# Altium PCB PCB.PcbDoc
Units mm, origin at the board's own origin, x right, y up, seen from the top; angles counter-clockwise.
Board outline 150 x 150 mm, 2 copper layers (Top Layer, Bottom Layer); 62 components, 49 nets, 295 pads, 0 vias.
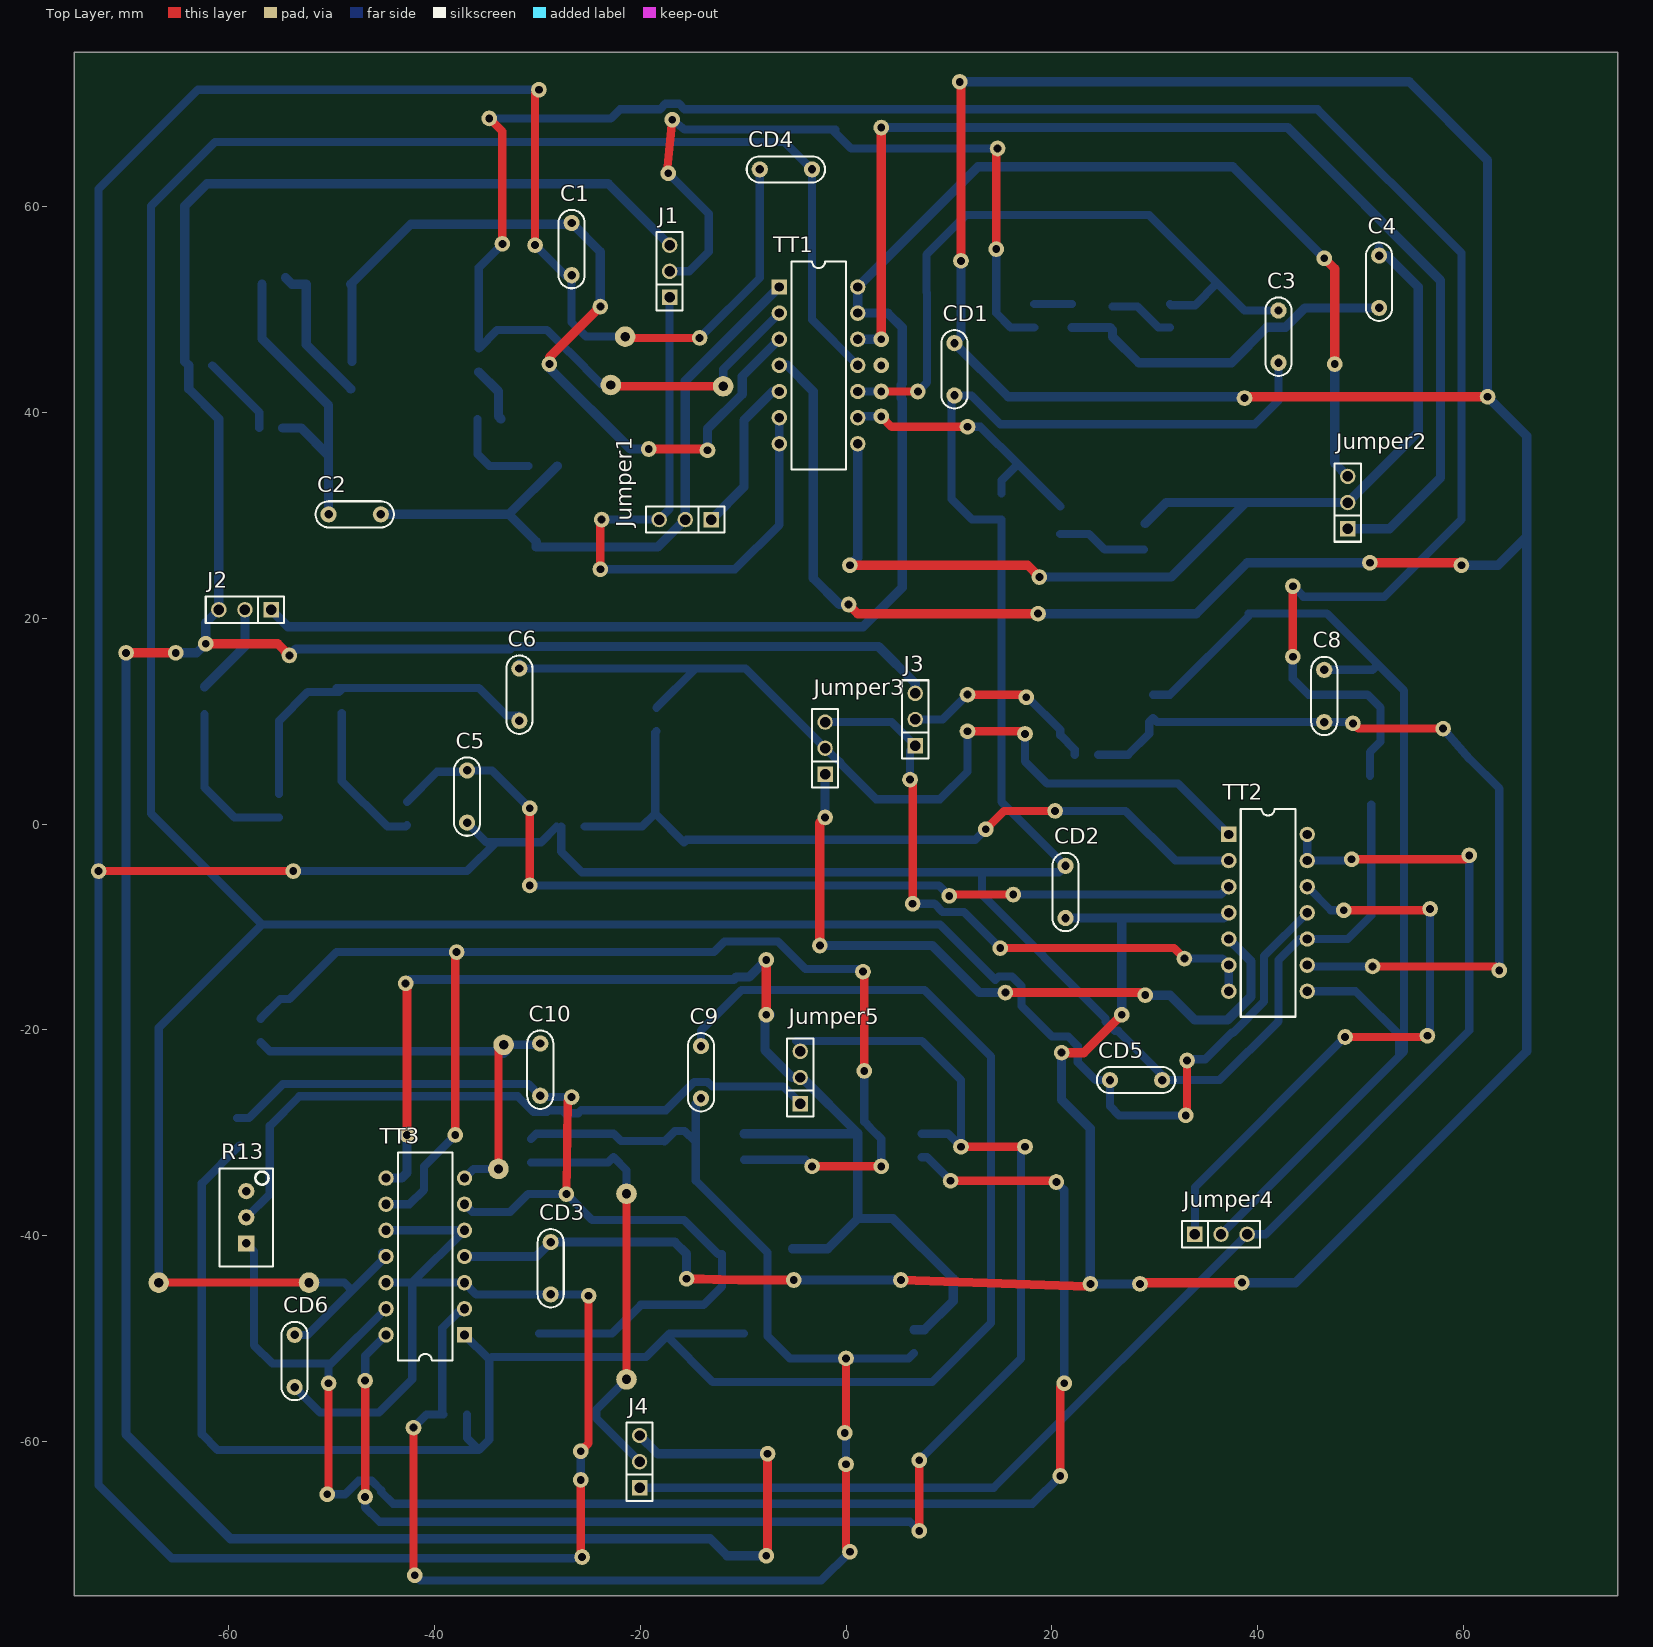
[diagram p0: Top Layer view]
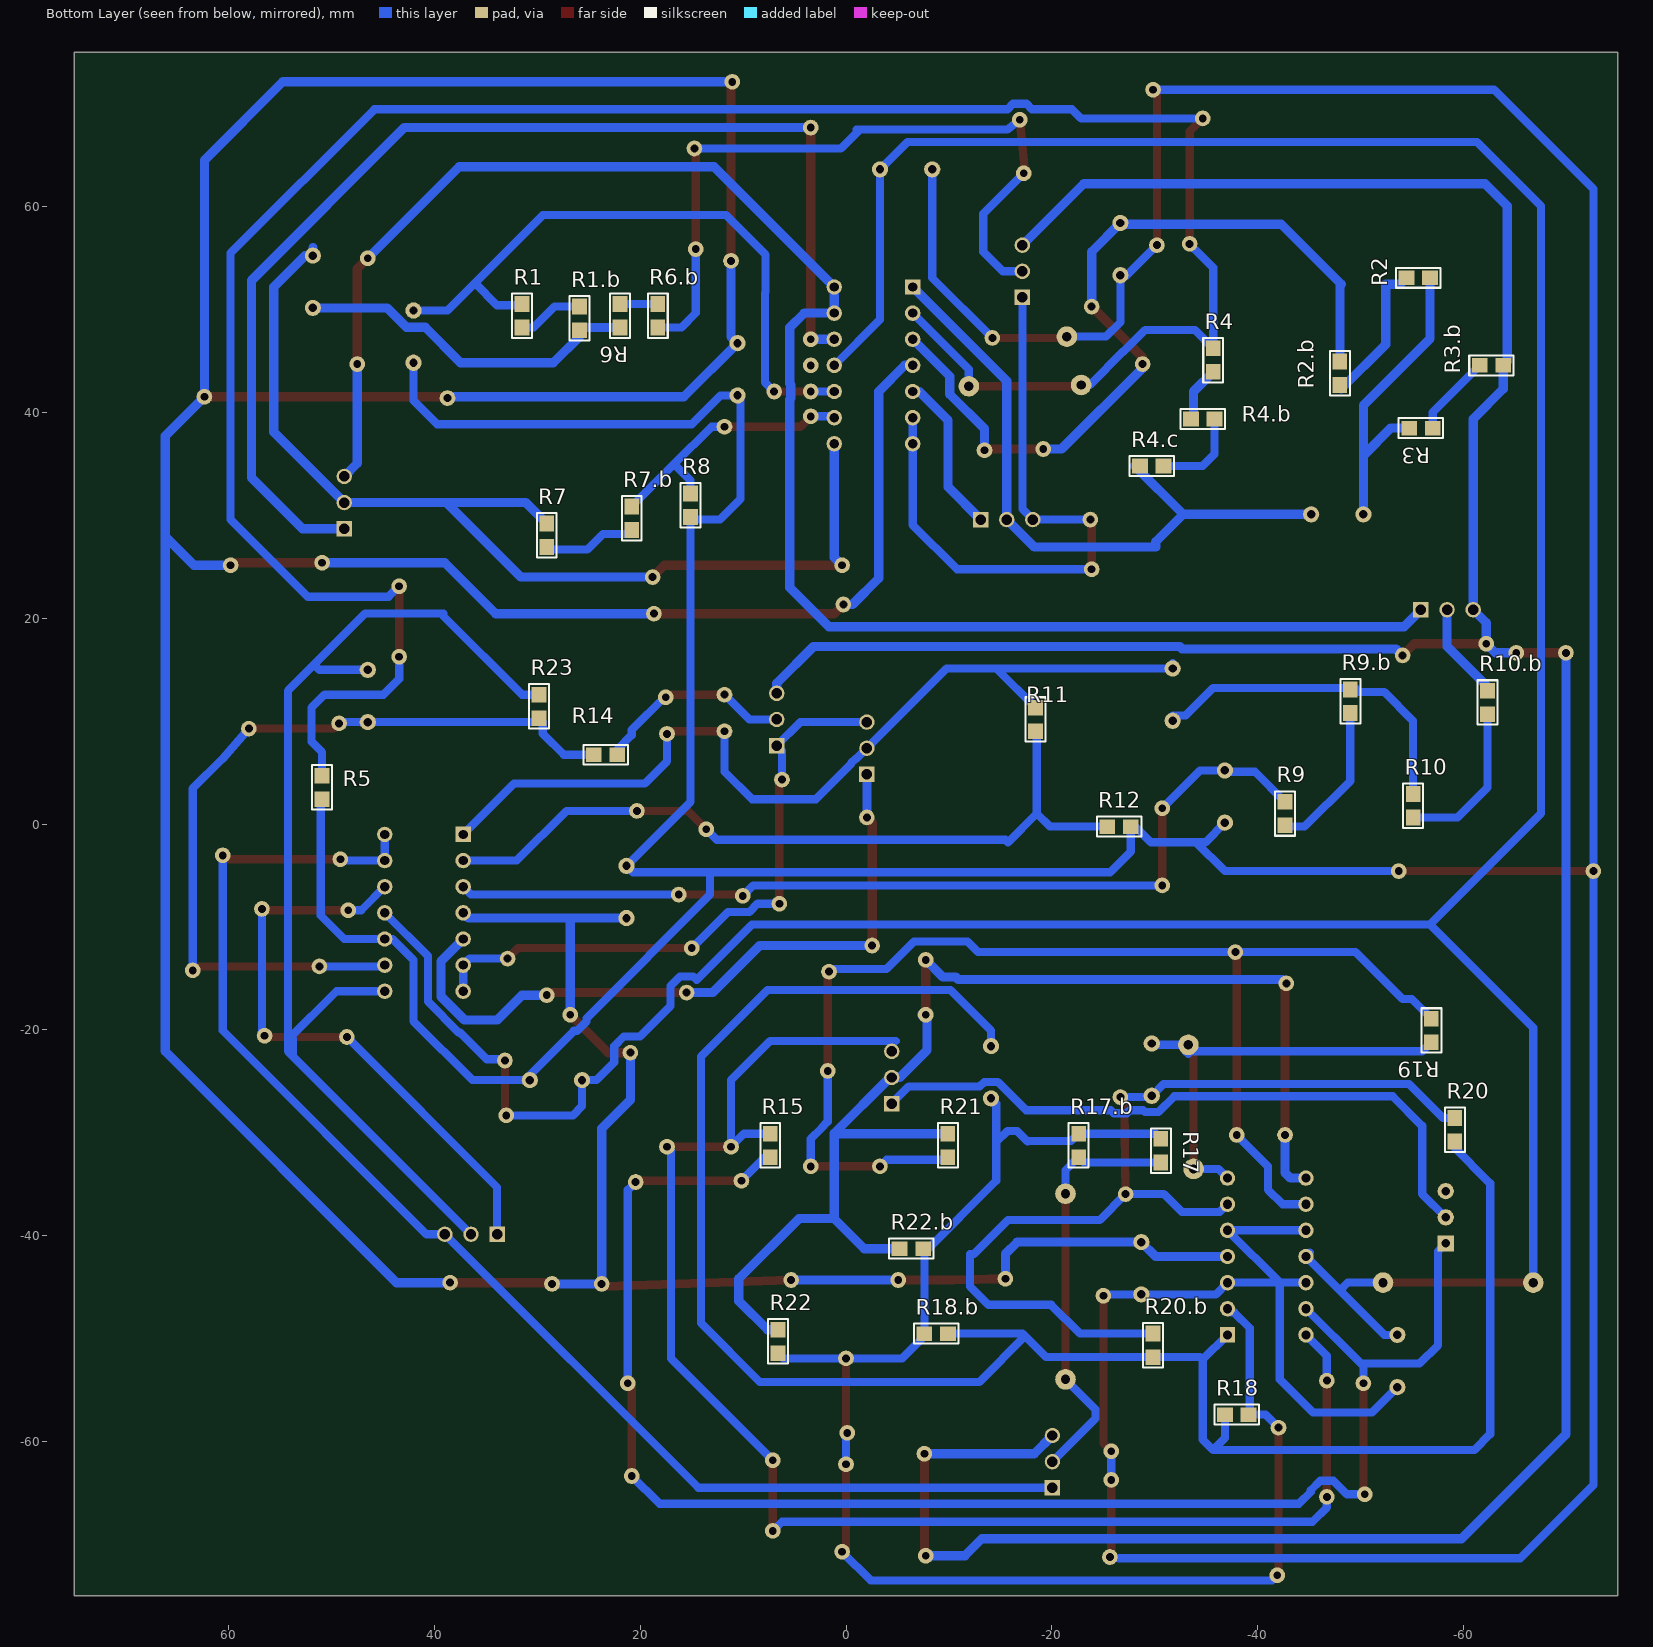
[diagram p1: Bottom Layer view, seen from below]
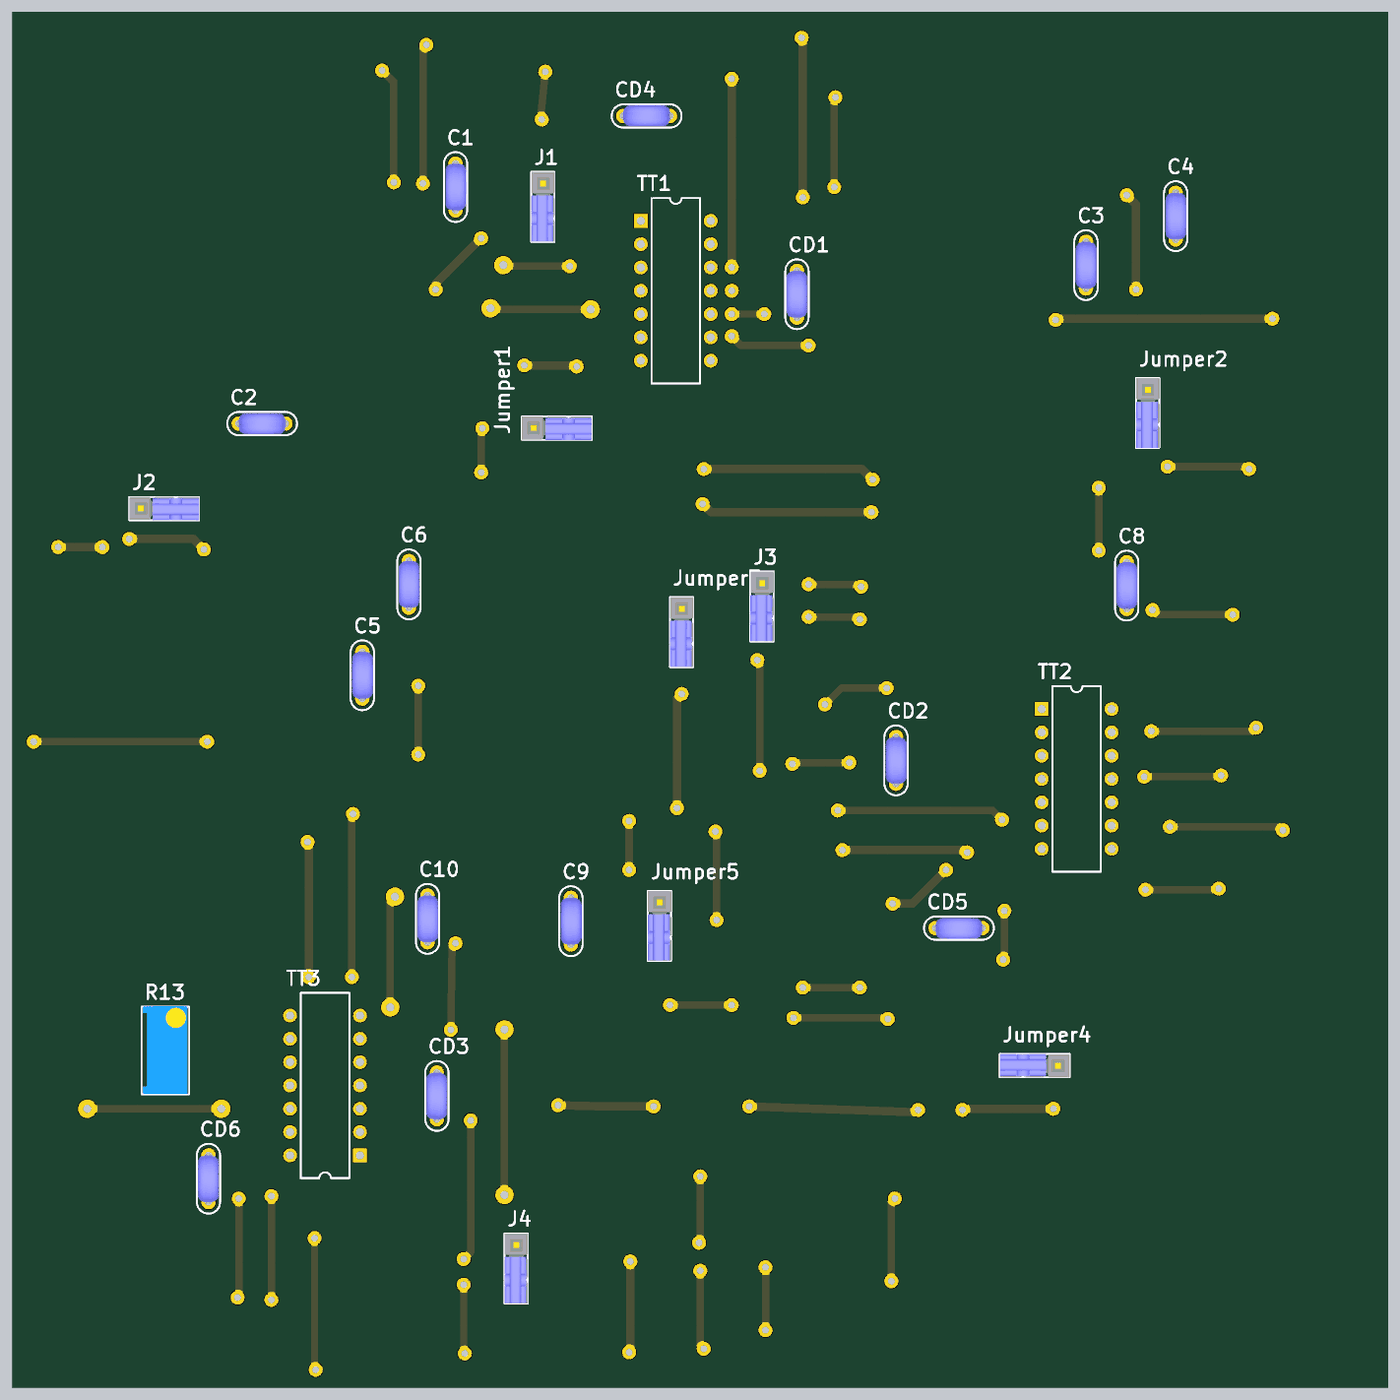
[diagram p2: 3D render of the assembled board from above, using the file's embedded part models]
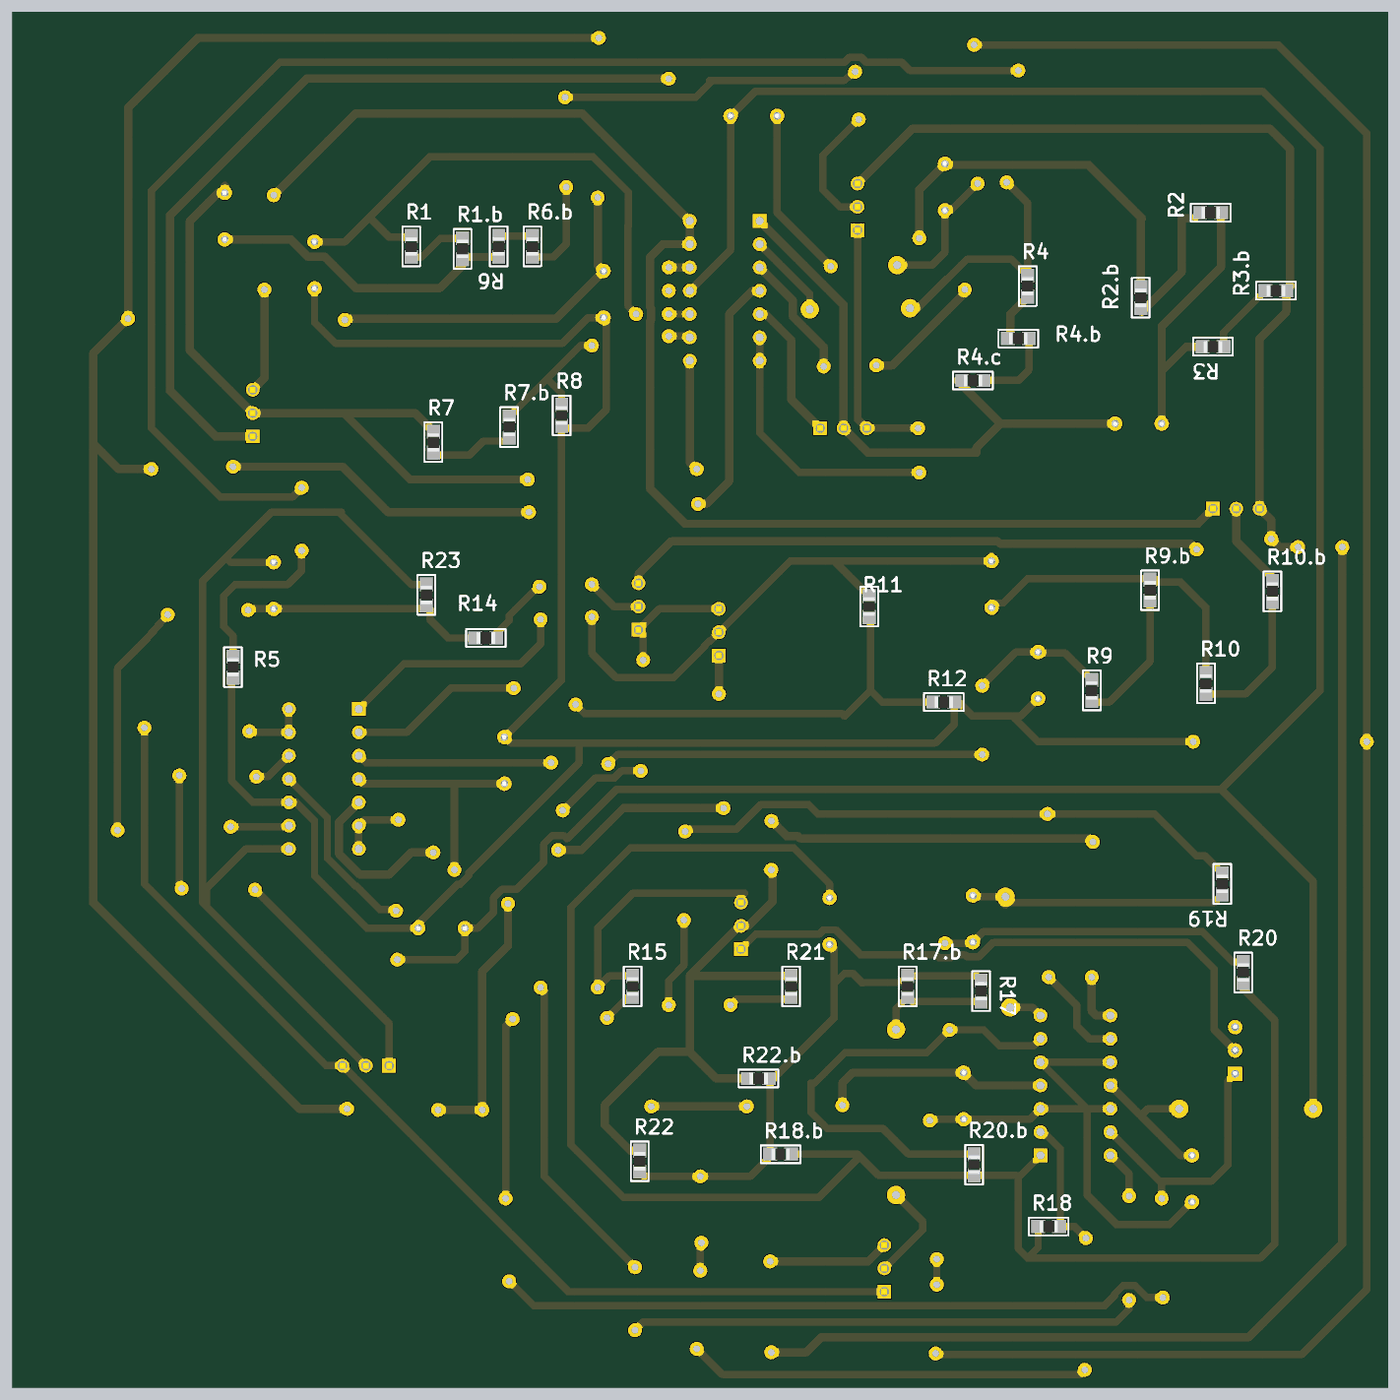
[diagram p3: 3D render of the assembled board from below, using the file's embedded part models]

## Layer stack, top to bottom
Top Solder: solder mask 0.0102, Solder Resist, Dk 3.5
Top Layer: signal copper 0.0356
Dielectric 1: dielectric 0.32, FR-4, Dk 4.8
Bottom Layer: signal copper 0.0356
Bottom Solder: solder mask 0.0102, Solder Resist, Dk 3.5

## Board outline
75,75 75,-75 -75,-75 -75,75

## Design rules (kind name [scope] priority, off if disabled: settings)
Clearance [All] p1: gap=0.4 ignorepadtopadclearanceinfootprint=FALSE except(0: Arc-Hole Track-Hole SMDPad-Hole THPad-Hole Via-Hole Fill-Hole Poly-Hole Region-Hole Text-Hole)
PolygonConnect [All] p1: connectstyle=Relief reliefconductorwidth=0.254 reliefentries=4 polygonreliefangle="90 Angle" airgapwidth=0.254
RoutingVias [All] p1: holewidth=0.5 width=2 viastyle="Through Hole" minholewidth=0.3 minwidth=1.5 maxholewidth=0.5 maxwidth=2
SolderMaskExpansion [All] p1: expansion=0.102
Width [All] p1: maxlimit=0.9 minlimit=0.8 preferedwidth=0.9
30 further rules are at their usual default settings.

## Components (designator, comment, footprint, x,y, rotation, side; value= is the part's Value field where it differs from the comment)
C1 "1n" CAP200 -26.67,55.88 r90 top
C2 "1n" CAP200 -47.752,30.099 r0 top
C3 "1n" CAP200 42.037,47.371 r90 top
C4 "1n" CAP200 51.816,52.705 r90 top
C5 "1n" CAP200 -36.83,2.667 r90 top
C6 "1n" CAP200 -31.75,12.573 r90 top
C8 "7.9n" CAP200 46.482,12.446 r90 top
C9 "10n" CAP200 -14.097,-24.13 r90 top
C10 "10n" CAP200 -29.718,-23.876 r90 top
CD1 "100n" CAP200 10.541,44.196 r270 top
CD2 "100n" CAP200 21.336,-6.604 r90 top
CD3 "100n" CAP200 -28.702,-43.18 r270 top
CD4 "100n" CAP200 -5.842,63.627 r180 top
CD5 "100n" CAP200 28.194,-24.892 r0 top
CD6 "100n" CAP200 -53.594,-52.197 r270 top
J1 "JUMPER" JUMPER3 -17.145,53.721 r90 top
J2 "JUMPER" JUMPER3 -58.42,20.828 r180 top
J3 "JUMPER" JUMPER3 6.731,10.16 r90 top
J4 "JUMPER" JUMPER3 -20.066,-61.976 r90 top
Jumper1 "JUMPER" JUMPER3 -15.621,29.591 r180 top
Jumper2 "JUMPER" JUMPER3 48.768,31.242 r90 top
Jumper3 "JUMPER" JUMPER3 -2.032,7.366 r90 top
Jumper4 "JUMPER" JUMPER3 36.449,-39.878 r0 top
Jumper5 "JUMPER" JUMPER3 -4.445,-24.638 r90 top
R1 "5.1k" 0805 31.496,49.403 r90 bottom
R1.b "39k" 0805 25.908,49.149 r90 bottom
R2 "33k" 0805 -55.626,53.086 r0 bottom
R2.b "2.2k" 0805 -48.006,43.815 r90 bottom
R3 "2.2k" 0805 -55.88,38.481 r0 bottom
R3.b "33k" 0805 -62.738,44.577 r0 bottom
R4 "8.2k" 0805 -35.687,45.085 r90 bottom
R4.b "6.8k" 0805 -34.671,39.37 r180 bottom
R4.c "1k" 0805 -29.718,34.798 r0 bottom
R5 "10k" 0805 50.927,3.556 r90 bottom
R6 "5.1k" 0805 21.971,49.403 r270 bottom
R6.b "39k" 0805 18.288,49.403 r90 bottom
R7 "1.5k" 0805 29.083,28.067 r90 bottom
R7.b "10k" 0805 20.828,29.718 r90 bottom
R8 "10k" 0805 15.113,30.988 r90 bottom
R9 "15k" 0805 -42.672,1.016 r90 bottom
R9.b "47k" 0805 -49.022,11.938 r270 bottom
R10 "15k" 0805 -55.118,1.778 r90 bottom
R10.b "47k" 0805 -62.357,11.811 r270 bottom
R11 "5.1k" 0805 -18.415,10.16 r270 bottom
R12 "10k" 0805 -26.543,-0.254 r0 bottom
R13 "15k" "PRESET V" -58.293,-38.227 r90 top
R14 "10k" 0805 23.368,6.731 r0 bottom
R15 "1.2k" 0805 7.366,-31.242 r90 bottom
R17 "5.6k" 0805 -30.607,-31.75 r90 bottom
R17.b "6.8k" 0805 -22.606,-31.242 r90 bottom
R18 "47k" 0805 -37.973,-57.404 r0 bottom
R18.b "47k" 0805 -8.763,-49.53 r180 bottom
R19 "10k" 0805 -56.896,-20.066 r90 bottom
R20 "5.6k" 0805 -59.182,-29.718 r90 bottom
R20.b "6.8k" 0805 -29.845,-50.673 r90 bottom
R21 "10k" 0805 -9.906,-31.242 r90 bottom
R22 "5.6k" 0805 6.604,-50.292 r90 bottom
R22.b "6.8k" 0805 -6.35,-41.275 r0 bottom
R23 "10k" 0805 29.845,11.43 r90 bottom
TT1 "TL084ACN" DIP14 -2.667,44.577 r270 top
TT2 "TL084ACN" DIP14 41.021,-8.636 r270 top
TT3 "TL084ACN" DIP14 -40.894,-42.037 r90 top

## Footprints (in the part's own frame and the unit in brackets; to place one, negate y for a bottom-side part, rotate by r counter-clockwise, add the part's x,y. Pads: shape width x height; smd on the part's side, far side on the other; paste and mask are expansions set on the pad)
0805 [mil] "Pasivo 0805"
  rect 60x56 smd: 1(-45,0) 2(45,0)
  silkscreen extent -85,-38 85,38, body extent -40,-25 39,25, height 15
CAP200 [mil]
  round 62 hole 32: 1(-100,0) 2(100,0)
  silkscreen extent -150,-50 150,50, body extent -110,-46 110,44, height 246
DIP14 [mm] "DIP; 14 Leads; Row Spacing 7.62 mm; Pitch 2.54 mm"
  rect 1.5x1.5 hole 0.9: 1(-7.62,-3.81)
  round 1.5 hole 0.9: 2(-5.08,-3.81) 3(-2.54,-3.81) 4(0,-3.81) 5(2.54,-3.81) 6(5.08,-3.81) 7(7.62,-3.81) 8(7.62,3.81) 9(5.08,3.81) 10(2.54,3.81) 11(0,3.81) 12(-2.54,3.81) 13(-5.08,3.81) 14(-7.62,3.81)
  silkscreen extent -10.1,-2.65 10.1,2.65
JUMPER3 [mm]
  rect 1.5x1.5 hole 1.016: 1(-2.54,0)
  round 1.5 hole 1.016: 2(0,0) 3(2.54,0)
  silkscreen extent -3.81,-1.27 3.81,1.27, body extent -3.81,-1.3 3.81,1.27, height 16.15
"PRESET V" [mil]
  rect 62x62 hole 32: 1(-100,0)
  round 62 hole 32: 2(0,0) 3(100,0)
  silkscreen extent -188,-102 188,102, body extent -185,-95 190,95, height 455

## Part data
C1 C2 C3 C4 C5 C6 C8 C9 C10 CD1 CD2 CD3 CD4 CD5 CD6: library part CAP
J1 J2 J3 J4 Jumper1 Jumper2 Jumper3 Jumper4 Jumper5: library part JUMPER3
R1 R1.b R2 R2.b R3 R3.b R4 R4.b R4.c R5 R6 R6.b R7 R7.b R8 R9 R9.b R10 R10.b R11 R12 R14 R15 R17 R17.b R18 R18.b R19 R20 R20.b R21 R22 R22.b R23: library part RES
R13: library part PRESET
TT1 TT2 TT3: "General-Purpose J-FET Quad Operational Amplifier", ComponentLink1Description="Manufacturer Link", ComponentLink1URL=http://www.st.com/, ComponentLink2Description=Datasheet, ComponentLink2URL=http://www.st.com/stonline/products/literature/ds/2301/tl084.pdf, DatasheetVersion=Jan-1999, LatestRevisionDate=06-Jun-2005, LatestRevisionNote="Stylized 3D Model Added.", PackageDescription="DIP; 14 Leads; Row Spacing 7.62 mm; Pitch 2.54 mm", PackageReference=DIP14, PackageVersion=Jan-1997, Published=24-Aug-2001, Publisher="Altium Limited"

## Free pads (board coordinates)
  round 2 hole 0.9: 2(-21.336,-35.941) 3(-21.336,-53.975) 4(-52.197,-44.577) 5(-66.802,-44.577) 8(-22.86,42.672) 8(-11.938,42.545) 11(-21.463,47.371) 13(-33.782,-33.528) 14(-33.274,-21.463)
  round 1.524 hole 0.762: 9(-23.749,29.591) 10(-23.876,24.765) 12(-14.224,47.244) 15(-26.67,-26.543) 16(-27.178,-35.973) 19(11.176,-31.369) 20(17.399,-31.369) 21(-46.736,-54.102) 22(-46.736,-65.405) 23(7.112,-61.849) 24(7.112,-68.707) 25(-23.876,50.292) 26(-28.829,44.704) 27(-19.177,36.449) 28(-13.462,36.322) 29(10.16,-34.671) 30(20.447,-34.798) 31(21.209,-54.356) 32(20.828,-63.373) 33(-50.292,-54.356) 34(-50.419,-65.151) 35(3.429,42.037) 36(6.985,42.037) 41(47.498,44.704) 42(46.482,54.991) 45(49.149,-3.429) 46(60.579,-3.048) 47(-30.734,-5.969) 48(-30.734,1.524) 49(10.033,-6.985) 50(16.256,-6.858) 51(13.589,-0.508) 52(20.32,1.27) 54(11.811,12.573) 55(17.526,12.319) 56(11.811,9.017) 57(17.399,8.763) 58(11.811,38.608) 59(3.429,39.624) 60(-15.494,-44.196) 61(-5.08,-44.323) 62(5.334,-44.323) 63(23.749,-44.704) 64(20.955,-22.225) 66(48.387,-8.382) 67(48.514,-20.701) 70(-7.62,-61.214) 71(-7.747,-71.12) 72(-54.102,16.383) 73(-69.977,16.637) 74(-65.151,16.637) 75(-62.23,17.526) 76(26.797,-18.542) 77(-2.032,0.635) 78(-2.54,-11.811) 79(15.494,-16.383) 80(29.083,-16.637) 81(32.893,-13.081) 82(14.986,-12.065) 83(6.477,-7.747) 84(6.223,4.318) 85(14.605,55.88) 86(14.732,65.659) 87(-17.272,63.246) 88(-16.891,68.453) 90(-33.401,56.388) 91(-34.671,68.58) 92(43.434,23.114) 93(43.434,16.256) 94(33.147,-22.987) 95(33.02,-28.321) 96(56.769,-8.255) 97(56.515,-20.574) 98(51.181,-13.843) 99(63.5,-14.224) 100(49.276,9.779) 101(58.039,9.271) 102(0.381,25.146) 103(18.796,24.003) 104(3.429,47.117) 105(3.429,44.577) 106(3.429,67.691) 107(-25.019,-45.847) 108(-25.781,-60.96) 109(-25.781,-63.754) 110(-25.654,-71.247) 111(-53.721,-4.572) 112(-72.644,-4.572) 113(-42.672,-30.226) 114(-42.799,-15.494) 115(-7.747,-13.208) 116(-7.747,-18.542) 117(1.651,-14.351) 118(1.778,-24.003) 119(3.429,-33.274) 120(-3.302,-33.274) 121(-37.973,-30.226) 122(-37.846,-12.446) 123(38.735,41.402) 124(62.357,41.529) 125(28.575,-44.704) 126(38.481,-44.577) 127(11.176,54.737) 128(11.049,72.136) 130(-30.226,56.261) 131(-29.845,71.374) 132(0.254,21.336) 133(18.669,20.447) 134(50.927,25.4) 135(59.817,25.146) 137(-42.037,-58.674) 138(-41.91,-73.025) 139(0,-62.23) 140(0.381,-70.739) 141(0,-51.943) 142(-0.127,-59.182)

## Nets (pads, with @x,y where several pads share a name; then routed paths per layer and width w, separated by ;. In a path a pad name is that pad's centre, name@x,y a point inside that pad or via, vN(x,y) a via of type N, cw(c..) or ccw(c..) an arc to the next point about the centre after c; other vN are vias at no path point)
GND: C1.1 C3.1 C5.1 CD1.2 CD2.2 CD3.2 CD4.2 CD5.2 CD6.2 pad.11 pad.12 pad.107 pad.108 pad.109 pad.110 pad.111 pad.112 pad.130 pad.131 R5.1 R8.1 R12.1 TT2.10 TT3.3 TT3.5 TT3.10 TT3.12 | length 623.9
  Top Layer w0.8: pad.112 pad.111 ; pad.130 -30.226,70.993 pad.131 ; pad.109 -25.781,-71.12 pad.110 ; pad.108 -25.019,-60.198 pad.107 ; pad.11 -21.336,47.244 pad.12
  Bottom Layer w0.8: pad.111 -36.83,-4.572 -34.036,-1.778 ; CD6.2 -51.117,-57.213 -45.402,-57.213 -42.164,-53.975 -42.164,-44.577 ; TT3.12 -42.164,-44.577 ; TT3.10 TT3.5 -42.164,-44.577 ; C5.1 -34.925,-1.778 -34.036,-1.778 ; pad.130 -27.305,53.34 C1.1 -26.67,48.768 -25.273,47.371 pad.11 ; pad.131 -62.992,71.374 -72.644,61.722 pad.112 -72.644,-64.262 -65.532,-71.374 -26.543,-71.374 pad.110 ; R12.1@-28.144,-0.267 -29.656,-1.778 -34.036,-1.778 ; R12.1 -27.686,-2.667 -25.654,-4.699 13.208,-4.699 ; pad.109 pad.108 ; pad.107 -25.146,-45.72 CD3.2 -35.941,-45.72 TT3.3 -42.164,-44.577 ; pad.12 -8.382,53.086 CD4.2 ; C3.1 42.037,41.148 39.751,38.862 14.986,38.862 12.192,41.656 CD1.2 10.249,41.364 10.249,31.585 12.243,29.591 15.113,29.591 15.113,2.159 CD2.2 20.701,-4.699 13.208,-4.699 ; R5.1@51.054,1.905 51.054,-8.89 48.768,-11.176 TT2.10 44.069,-11.176 42.037,-13.208 42.037,-19.177 36.322,-24.892 CD5.2 30.734,-24.384 26.454,-20.104 26.15,-20.104 25.235,-19.189 25.235,-18.885 13.208,-6.858 13.208,-4.699
NetC1_2: C1.2 pad.25 pad.26 pad.27 pad.28 R2.b.2 TT1.3 | length 81.2
  Top Layer w0.9: pad.26 -28.829,45.339 pad.25 ; pad.27 -13.589,36.449 pad.28
  Bottom Layer w0.9: R2.b.2 -48.006,52.324 -48.133,52.451 -42.291,58.293 -26.797,58.293 C1.2 -23.876,55.626 pad.25 ; pad.26 -28.829,44.323 -20.955,36.449 pad.27 ; pad.28 -13.462,38.405 -10.088,41.779 -10.088,43.506 TT1.3
NetC2_1: C2.1 R2.1 R3.2 | length 30.6
  Bottom Layer w0.9: R2.1@-56.769,52.451 -56.769,47.177 -50.292,40.7 -50.292,35.814 ; R3.2 -52.959,38.481 -50.292,35.814 ; C2.1 -50.292,35.814
NetC3_2: C3.2 pad.35 pad.36 R1.2 TT1.10 | length 64.7
  Top Layer w0.8: pad.35 pad.36
  Bottom Layer w0.8: TT1.10 pad.35 ; pad.36 7.874,42.926 7.874,51.639 7.836,51.677 7.836,55.334 11.684,59.182 29.464,59.182 36.068,52.578 ; R1.2 31.623,50.419 33.909,50.419 36.068,52.578 ; C3.2 38.735,49.911 36.068,52.578
NetC4_1: C4.1 R1.b.1 R6.2 | length 33.8
  Bottom Layer w0.9: R6.2 25.654,48.26 R1.b.1 25.908,47.371 28.448,44.831 37.465,44.831 40.908,48.274 42.715,48.274 44.607,50.165 C4.1
NetC5_2: C5.2 pad.47 pad.48 pad.49 pad.50 R9.2 TT2.3 | length 91
  Top Layer w0.8: pad.47 pad.48 ; pad.49 10.16,-6.858 pad.50
  Bottom Layer w0.8: R9.2 -39.751,5.08 -36.957,5.08 C5.2 -34.417,5.207 pad.48 ; pad.47 9.017,-5.969 pad.49 ; pad.50 36.449,-6.858 TT2.3
NetC6_1: C6.1 R9.b.1 R10.2 | length 33.4
  Bottom Layer w0.8: R10.2 -55.118,10.033 -52.324,12.827 -49.276,12.827 R9.b.1 ; R9.b.1@-49.53,13.208 -35.687,13.208 -33.02,10.541 C6.1@-31.75,10.541
NetC8_1: C8.1 pad.98 pad.99 pad.100 pad.101 R14.2 R23.1 TT2.9 | length 80.6
  Top Layer w0.8: pad.100 49.784,9.271 pad.101 ; pad.98 63.119,-13.843 pad.99
  Bottom Layer w0.8: R14.2 27.432,6.731 29.464,8.763 29.464,9.906 R23.1 30.226,9.906 C8.1 49.149,9.906 pad.100 ; TT2.9 44.958,-13.843 pad.98 ; pad.101 60.579,6.35 63.5,3.429 pad.99
NetC9_1: C9.1 pad.137 pad.138 pad.139 pad.140 pad.141 pad.142 R17.2 R17.b.2 R18.1 R18.b.1 R22.1 R22.b.1 TT3.2 | length 150.9
  Top Layer w0.8: pad.137 -42.037,-72.898 pad.138 ; pad.142 0,-59.055 pad.141 ; pad.139 0,-70.358 pad.140
  Bottom Layer w0.8: pad.137 -40.767,-57.404 R18.1@-39.243,-57.404 ; pad.138 -41.402,-73.533 -2.413,-73.533 pad.140 ; R18.1 R18.1@-39.243,-57.404 ; TT3.2 -37.434,-47.467 -37.734,-47.467 -39.243,-48.976 R18.1@-39.243,-57.404 ; R17.2 -30.099,-30.099 R17.b.2 -21.882,-30.823 -17.653,-30.823 -17.653,-30.861 -16.637,-29.845 -15.684,-29.845 -14.605,-30.924 ; C9.1 -14.605,-27.178 -14.605,-30.924 ; pad.142 0,-59.309 pad.139 ; R22.1 6.096,-51.943 pad.141 -5.461,-51.943 -7.62,-49.784 R18.b.1 -7.62,-41.656 -14.605,-34.671 -14.605,-30.924
NetC9_2: C9.2 R18.2 R18.b.2 R20.1 R20.b.1 TT3.1 | length 195.1
  Bottom Layer w0.8: R20.1@-58.928,-31.242 -62.611,-34.925 -62.611,-59.309 -61.087,-60.833 -35.687,-60.833 ; TT3.1 -34.671,-52.07 ; R18.2 -36.83,-59.69 -35.687,-60.833 ; -17.399,-49.784 -12.954,-54.229 8.382,-54.229 14.097,-48.514 14.097,-22.606 7.62,-16.129 -10.16,-16.129 -14.097,-20.066 C9.2 ; R18.b.2 -17.145,-49.53 -19.431,-51.816 R20.b.1 -34.417,-51.816 -34.671,-52.07 ; -35.687,-60.833 -34.671,-59.817 -34.671,-52.07
NetC10_1: C10.1 pad.15 pad.16 R20.2 R20.b.2 TT3.6 | length 95.3
  Top Layer w0.8: pad.16 -27.051,-26.924 pad.15
  Bottom Layer w0.8: R20.2 -58.039,-28.575 -54.737,-25.273 -30.861,-25.273 C10.1 -29.591,-26.543 pad.15 ; TT3.6 -36.322,-37.719 -32.639,-37.719 -30.893,-35.973 pad.16 -24.67,-38.481 -15.748,-38.481 -12.446,-41.783 -12.065,-41.783 -12.065,-44.958 -13.843,-46.736 -19.939,-46.736 -22.733,-49.53 R20.b.2
NetC10_2: C10.2 pad.13 pad.14 R19.1 TT3.7 | length 45.1
  Top Layer w0.8: pad.13 -33.782,-21.971 pad.14
  Bottom Layer w0.8: R19.1 -56.007,-22.098 pad.14@-33.274,-22.098 ; TT3.7 -36.195,-33.528 pad.13 ; C10.2 -29.845,-21.463 pad.14 pad.14@-33.274,-22.098 ; pad.14@-33.274,-22.098 -33.274,-22.365 -33.007,-22.098 pad.14@-33.274,-22.098
NetJ1_2: J1.2 pad.85 pad.86 pad.87 pad.88 R6.b.1 | length 72.8
  Top Layer w0.8: pad.87 -17.399,63.373 pad.88 ; pad.85 14.605,65.642 pad.86
  Bottom Layer w0.8: pad.87 -13.335,59.309 -13.335,55.626 -15.24,53.721 J1.2 ; pad.88 -15.679,67.494 -1.017,67.494 -1.295,67.462 0.508,65.659 pad.86 ; pad.85 14.605,49.657 16.002,48.26 R6.b.1
NetJ2_2: J2.2 R10.b.1 | length 9.1
  Bottom Layer w0.9: R10.b.1@-62.357,13.335 -58.42,17.272 J2.2
NetJ3_2: J3.2 pad.54 pad.55 R14.1 | length 19.5
  Top Layer w0.8: pad.54 17.272,12.573 pad.55
  Bottom Layer w0.8: J3.2 9.398,10.16 pad.54 ; pad.55 17.653,12.319 20.828,9.144 20.828,8.636 22.225,7.239 R14.1
NetJ4_2: J4.2 pad.2 pad.3 R17.1 R17.b.1 | length 41.3
  Top Layer w0.8: pad.3 pad.2
  Bottom Layer w0.8: R17.1 -23.114,-32.893 R17.b.1 -21.336,-33.655 pad.2 ; pad.3 -24.257,-56.896 -24.257,-57.785 J4.2
NetJumper1_1: Jumper1.1 TT1.5 | length 15.6
  Bottom Layer w0.9: Jumper1.1 -9.906,32.766 -9.906,39.243 -7.112,42.037 TT1.5
NetJumper2_1: Jumper2.1 pad.104 pad.106 TT1.12 | length 113.6
  Top Layer w0.9: pad.104 pad.106
  Bottom Layer w0.9: TT1.12 pad.104 ; pad.106 42.926,67.691 57.785,52.832 57.785,33.655 52.832,28.702 Jumper2.1
NetJumper3_1: Jumper3.1 pad.77 pad.78 pad.79 pad.80 TT2.5 | length 69.2
  Top Layer w0.9: pad.78 -2.54,0.127 pad.77 ; pad.79 28.829,-16.383 pad.80
  Bottom Layer w0.9: pad.78 8.382,-11.811 12.954,-16.383 pad.79 ; pad.77 Jumper3.1 ; pad.80 31.496,-16.637 33.909,-19.05 37.084,-19.05 39.37,-16.764 39.37,-13.335 TT2.5
NetJumper4_1: Jumper4.1 pad.66 pad.67 pad.96 pad.97 TT2.12 | length 58.8
  Top Layer w0.8: pad.67 56.388,-20.701 pad.97 ; pad.66@48.514,-8.509 pad.66 56.642,-8.382 pad.96
  Bottom Layer w0.8: Jumper4.1 33.909,-35.306 pad.67 ; TT2.12 47.117,-8.382 pad.66 ; pad.97 56.769,-20.32 pad.96
NetJumper5_1: Jumper5.1 R13.2 | length 65.5
  Bottom Layer w0.8: R13.2 -56.007,-35.941 -56.007,-29.337 -53.143,-26.473 -31.906,-26.473 -30.376,-28.003 -29.06,-28.003 -28.87,-27.813 -27.609,-27.813 -27.317,-28.105 -26.023,-28.105 -25.731,-27.813 -17.485,-27.813 -14.755,-25.083 -13.439,-25.083 -12.995,-25.527 -6.096,-25.527 Jumper5.1
NetR1_1: R1.1 R1.b.2 | length 6.4
  Bottom Layer w0.8: R1.b.2 28.321,50.292 30.353,48.26 R1.1
NetR2_2: R2.2 R2.b.1 | length 14.2
  Bottom Layer w0.9: R2.2 -53.848,52.451 -52.451,52.451 -52.451,46.609 R2.b.1@-48.133,42.291
NetR3_1: R3.1 R3.b.2 | length 8
  Bottom Layer w0.8: R3.b.2 -57.023,40.005 R3.1
NetR4.b_2: R4.b.2 R4.c.1 | length 8.9
  Bottom Layer w0.8: R4.b.2 -35.814,35.941 -34.671,34.798 R4.c.1
NetR4_1: R4.1 R4.b.1 | length 5.5
  Bottom Layer w0.9: R4.1 -33.782,42.037 -33.782,39.624 R4.b.1
NetR4_2: pad.8 pad.90 pad.91 pad.92 pad.93 R4.2 R5.2 TT1.2 | length 232.6
  Top Layer w0.8: pad.91 -33.401,67.31 pad.90 ; pad.8@-22.86,42.672 -22.733,42.545 pad.8@-11.938,42.545 ; pad.93 pad.92
  Bottom Layer w0.8: pad.91 -22.86,68.58 -21.971,69.469 -18.084,69.469 -17.538,70.015 -16.244,70.015 -15.698,69.469 45.847,69.469 59.817,55.499 59.817,29.591 52.324,22.098 44.45,22.098 pad.92 ; pad.90 -35.687,54.102 R4.2 -33.909,48.006 -29.083,48.006 -27.031,45.954 -26.991,45.954 -23.709,42.672 pad.8@-22.86,42.672 ; pad.8@-11.938,42.545 -11.938,44.196 TT1.2 ; pad.93 43.434,14.097 44.958,12.573 50.673,12.573 51.943,11.303 51.943,8.001 50.927,6.985 R5.2
NetR6_1: R6.1 R6.b.2 | length 3.7
  Bottom Layer w0.8: R6.b.2 R6.1
NetR7.b_2: pad.58 pad.59 R7.b.2 R8.2 TT1.9 | length 26.9
  Top Layer w0.8: pad.59 4.445,38.608 pad.58
  Bottom Layer w0.8: TT1.9 1.27,39.624 pad.59 ; pad.58 13.081,38.608 16.7,34.989 ; R8.2 15.113,33.401 16.7,34.989 ; R7.b.2 16.7,34.989
NetR7_1: R7.1 R7.b.1 | length 8.8
  Bottom Layer w0.8: R7.b.1@20.828,28.194 23.622,28.194 25.146,26.67 R7.1@28.956,26.67
NetR9_1: R9.1 R9.b.2 | length 14.8
  Bottom Layer w0.8: R9.b.2 -49.022,4.191 -44.577,-0.254 -42.799,-0.254 R9.1
NetR10_1: R10.1 R10.b.2 | length 15.6
  Bottom Layer w0.8: R10.b.2 -62.357,3.556 -59.436,0.635 R10.1
NetR11_2: pad.51 pad.52 R11.2 R12.2 TT2.2 | length 75.6
  Top Layer w0.8: pad.51 15.367,1.27 pad.52
  Bottom Layer w0.8: R12.2 -19.812,-0.254 -18.542,1.016 ; R11.2 -18.542,8.89 -18.542,1.016 ; pad.51 12.573,-1.524 -15.494,-1.524 -15.748,-1.778 -18.542,1.016 ; pad.52 27.178,1.27 32.004,-3.556 TT2.2
NetR13_1: pad.29 pad.30 pad.31 pad.32 pad.33 pad.34 R13.1 R15.1 TT3.13 | length 155.9
  Top Layer w0.8: pad.34 -50.292,-65.024 pad.33 ; pad.29 20.32,-34.671 pad.30 ; pad.32 20.828,-54.737 pad.31
  Bottom Layer w0.8: R13.1 -57.531,-41.529 -57.531,-50.673 -55.753,-52.451 -50.038,-52.451 ; pad.34 -48.691,-65.151 -47.383,-63.843 -46.089,-63.843 -45.174,-64.758 -45.174,-64.935 -44.043,-66.066 18.135,-66.066 pad.32 ; pad.33 -50.292,-52.705 -50.038,-52.451 ; TT3.13 -50.038,-52.451 ; R15.1 7.874,-32.385 pad.29 ; pad.30 21.209,-35.56 pad.31
NetR19_2: pad.117 pad.118 pad.119 pad.120 pad.121 pad.122 R19.2 R21.1 TT3.9 | length 124.8
  Top Layer w0.8: pad.121 -37.973,-12.573 pad.122 ; pad.120 pad.119 ; pad.117 1.778,-14.478 pad.118
  Bottom Layer w0.8: R19.2 -54.991,-17.018 -54.102,-17.018 -49.53,-12.446 pad.122 -12.827,-12.446 -11.811,-11.43 -6.604,-11.43 -3.937,-14.097 1.397,-14.097 pad.117 ; TT3.9 -42.418,-36.957 -41.021,-35.56 -41.021,-33.274 pad.121 ; R21.1@-9.906,-32.639 -3.937,-32.639 pad.120 ; pad.118 1.778,-28.931 2.393,-29.546 2.393,-29.571 3.429,-30.607 pad.119
Vcc+: CD1.1 CD2.1 CD3.1 pad.60 pad.61 pad.62 pad.63 pad.64 pad.76 pad.123 pad.124 pad.125 pad.126 pad.127 pad.128 pad.132 pad.133 pad.134 pad.135 TT1.4 TT2.4 TT3.4 | length 492
  Top Layer w0.9: pad.60 -10.414,-44.323 pad.61 ; pad.132 1.143,20.447 pad.133 ; pad.62 23.495,-44.958 pad.63 ; pad.128 11.176,72.009 pad.127 ; pad.64 23.114,-22.225 pad.76 ; pad.125 28.702,-44.577 pad.126 ; pad.123 38.862,41.529 pad.124 ; pad.134 59.563,25.4 pad.135
  Bottom Layer w0.9: TT3.4 -30.099,-42.037 CD3.1 -16.637,-40.64 -15.494,-41.783 pad.60 ; TT1.4 -5.715,44.577 -3.175,42.037 -3.175,23.876 -0.635,21.336 pad.132 ; pad.61 pad.62 ; pad.128 54.737,72.136 62.357,64.516 pad.124 66.167,37.719 66.167,27.94 ; pad.127 11.176,47.371 CD1.1 15.762,41.515 38.735,41.515 pad.123 ; pad.133 34.036,20.447 38.989,25.4 pad.134 ; pad.64 20.955,-26.797 23.749,-29.591 pad.63 pad.125 ; CD2.1@21.209,-9.271 CD2.1 26.797,-9.144 ; pad.76 26.797,-9.144 ; TT2.4 36.703,-9.144 26.797,-9.144 ; pad.126 43.688,-44.577 66.167,-22.098 66.167,27.94 ; pad.135 63.373,25.146 66.167,27.94
Vcc-: CD4.1 CD5.1 CD6.1 pad.4 pad.5 pad.94 pad.95 TT1.11 TT2.11 TT3.11 | length 360.7
  Top Layer w0.8: pad.5 pad.4 ; pad.95 33.147,-28.194 pad.94
  Bottom Layer w0.8: pad.5 -66.802,-19.812 -56.769,-9.779 ; CD6.1 -52.324,-49.657 -48.006,-45.339 ; pad.4 -48.768,-44.577 -48.006,-45.339 ; TT3.11@-45.085,-41.656 TT3.11 -48.006,-45.339 ; TT1.11 -3.302,49.022 CD4.1 -5.969,66.294 -61.341,66.294 -67.564,60.071 -67.564,58.537 -67.564,1.016 -56.769,-9.779 ; pad.95 26.543,-28.321 25.654,-27.432 CD5.1 24.257,-24.892 22.517,-23.152 22.517,-21.578 21.602,-20.663 20.028,-20.663 17.056,-17.691 17.056,-15.736 16.141,-14.821 14.847,-14.821 14.535,-15.133 14.498,-15.133 9.144,-9.779 -56.769,-9.779 ; pad.94 33.274,-22.86 34.925,-22.86 37.485,-20.3 37.602,-20.3 40.64,-17.262 40.64,-12.827 TT2.11
Vi: J1.3 J2.3 J3.3 J4.3 pad.70 pad.71 pad.72 pad.73 pad.74 pad.75 R3.b.1 | length 341.5
  Top Layer w0.9: pad.73 pad.74 ; pad.75 -55.245,17.526 pad.72 ; pad.71 -7.62,-70.993 pad.70
  Bottom Layer w0.9: pad.73 -69.977,-59.309 -59.817,-69.469 -13.208,-69.469 -11.557,-71.12 pad.71 ; pad.74 -63.119,16.637 pad.75 -62.23,19.558 J2.3 -60.96,39.37 -63.881,42.291 R3.b.1 -64.262,44.958 -64.262,60.071 -62.103,62.23 -23.114,62.23 J1.3 ; pad.72 -53.467,17.018 -32.669,17.018 -32.428,17.258 3.161,17.258 6.731,13.689 J3.3 ; J4.3 -18.288,-61.214 pad.70
Vo(E1): J1.1 Jumper1.3 pad.9 pad.10 TT1.6 TT1.7 | length 62.1
  Top Layer w0.8: pad.10 -23.876,29.464 pad.9
  Bottom Layer w0.8: pad.10 -10.795,24.765 -6.477,29.083 TT1.7 TT1.6 ; pad.9 Jumper1.3 -17.145,30.607 J1.1
Vo(E2): J2.1 Jumper2.3 pad.41 pad.42 TT1.13 TT1.14 | length 172.4
  Top Layer w0.9: pad.42 47.498,53.975 pad.41
  Bottom Layer w0.9: J2.1 -54.229,19.177 1.651,19.177 5.461,22.987 5.461,41.281 5.373,41.369 5.373,42.705 5.461,42.793 5.461,48.26 4.064,49.657 TT1.13 TT1.14 12.827,63.881 37.592,63.881 pad.42 ; pad.41 47.498,35.052 Jumper2.3
Vo(E3): J3.1 Jumper3.3 pad.81 pad.82 pad.83 pad.84 TT2.6 TT2.7 | length 61.1
  Top Layer w0.8: pad.84 6.477,4.064 pad.83 ; pad.82 31.877,-12.065 pad.81
  Bottom Layer w0.8: Jumper3.3 4.445,9.906 J3.1 6.223,7.112 pad.84 ; pad.83 8.586,-7.747 9.386,-8.547 11.468,-8.547 pad.82 ; pad.81 36.576,-13.081 TT2.6 TT2.7
Vo(E4): J4.1 Jumper4.3 pad.45 pad.46 TT2.13 TT2.14 | length 134.9
  Top Layer w0.8: pad.45 60.198,-3.429 pad.46
  Bottom Layer w0.8: J4.1 14.351,-64.516 Jumper4.3 40.767,-39.878 60.579,-20.066 60.579,-3.302 60.833,-3.048 pad.46 ; TT2.14 TT2.13 49.022,-3.556 pad.45
Vo(E5): Jumper5.3 pad.19 pad.20 pad.21 pad.22 pad.23 pad.24 R15.2 TT3.14 | length 148.6
  Top Layer w0.8: pad.22 pad.21 ; pad.24 pad.23 ; pad.19 pad.20
  Bottom Layer w0.8: pad.22 -46.736,-66.421 -45.339,-67.818 6.223,-67.818 pad.24 ; pad.21 -46.736,-51.689 TT3.14 ; -4.826,-21.082 7.366,-21.082 11.176,-24.892 pad.19 9.906,-30.099 R15.2 ; pad.23 17.018,-51.943 17.018,-31.75 pad.20
Vo(J1): C2.2 Jumper1.2 R4.c.2 TT1.1 | length 65.3
  Bottom Layer w0.9: C2.2 -32.766,30.099 ; R4.c.2@-28.067,34.798 -32.766,30.099 ; TT1.1 -15.621,43.053 Jumper1.2 -18.288,26.924 -30.099,26.924 -30.099,27.432 -32.766,30.099
Vo(J2): C4.2 Jumper2.2 pad.102 pad.103 R7.2 TT1.8 | length 104.2
  Top Layer w0.9: pad.102 17.653,25.146 pad.103
  Bottom Layer w0.9: pad.102 1.143,25.908 TT1.8 ; pad.103 31.623,24.003 38.862,31.242 ; R7.2 31.115,31.242 38.862,31.242 ; C4.2@51.816,56.007 C4.2 52.578,55.245 55.626,52.197 55.626,38.1 Jumper2.2 38.862,31.242
Vo(J3): C6.2 Jumper3.2 pad.56 pad.57 R11.1 TT2.1 | length 90.6
  Top Layer w0.8: pad.56 17.145,9.017 pad.57
  Bottom Layer w0.8: C6.2@-31.75,15.621 -31.242,15.113 -14.605,15.113 ; R11.1 -14.605,15.113 ; pad.56 11.811,5.08 9.144,2.413 2.921,2.413 -0.482,5.816 -0.482,5.907 -0.951,6.376 -1.042,6.376 Jumper3.2 -9.779,15.113 -14.605,15.113 ; pad.57 17.399,6.096 19.558,3.937 32.258,3.937 TT2.1
Vo(J4): C8.2 Jumper4.2 R23.2 TT2.8 | length 109.5
  Bottom Layer w0.8: R23.2 31.496,12.573 39.116,20.193 39.116,20.447 46.736,20.447 51.689,15.494 ; Jumper4.2 53.785,-22.543 ; TT2.8 49.53,-16.256 54.229,-20.955 ; C8.2 51.181,14.986 51.689,15.494 ; 53.785,-20.892 53.785,-22.543 ; 51.689,15.494 54.229,12.954 54.229,-20.955 ; 53.785,-22.543 54.229,-22.098 54.229,-20.955
Vo(J5): Jumper5.2 pad.113 pad.114 pad.115 pad.116 R21.2 R22.2 R22.b.2 TT3.8 | length 124
  Top Layer w0.9: pad.114 -42.672,-15.621 pad.113 ; pad.116 pad.115
  Bottom Layer w0.9: TT3.8 -43.18,-34.417 -42.672,-33.909 pad.113 ; pad.114 -42.418,-15.113 -10.912,-15.113 -10.678,-14.879 -9.418,-14.879 pad.115 ; R21.2 1.108,-30.099 1.143,-30.064 ; pad.116@-7.366,-18.542 pad.116 -7.884,-18.679 -7.884,-21.971 -5.217,-24.638 Jumper5.2 -4.283,-24.638 1.143,-30.064 ; R22.b.2 -1.778,-41.275 1.143,-38.354 ; R22.2 7.62,-49.149 10.414,-46.355 10.414,-44.196 4.572,-38.354 1.143,-38.354 ; 1.143,-38.354 1.143,-30.064
"": 
pads on no net: R13.3